# EAGLE board EC544_v1 (EAGLE 9.6.2)
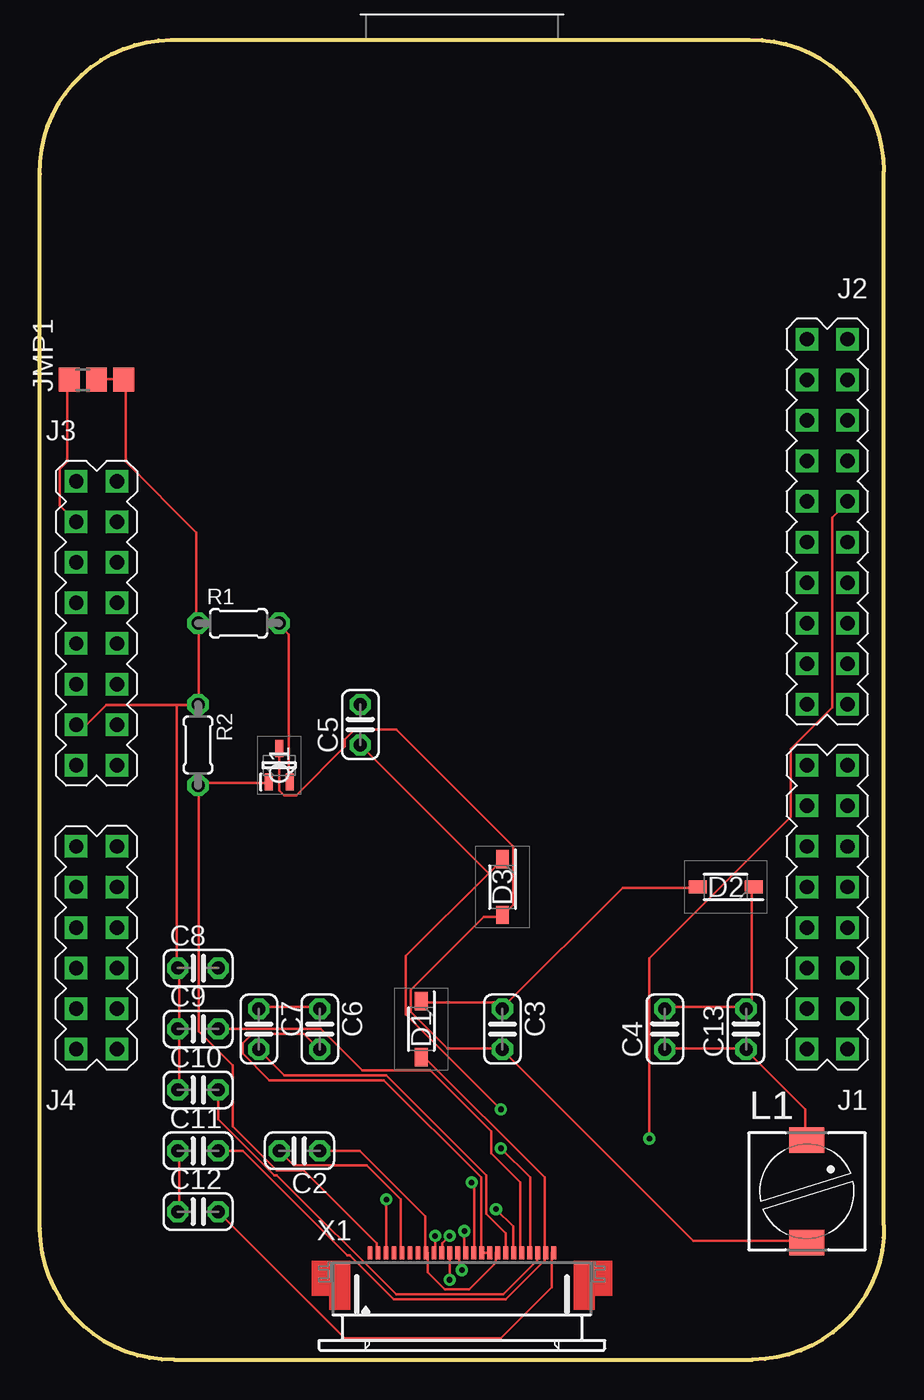
[diagram p0: board, top side]
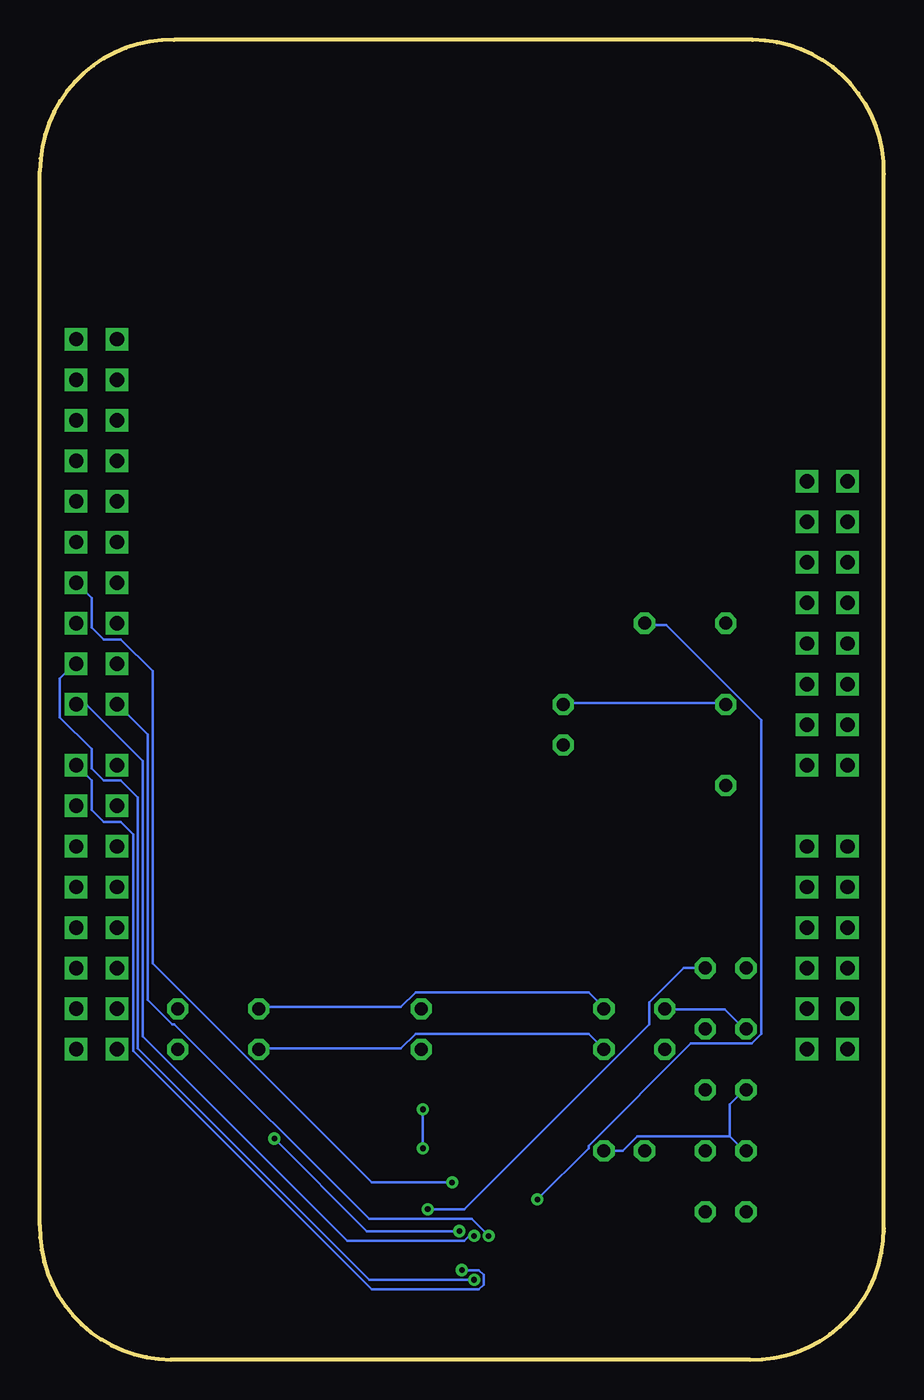
[diagram p1: board, bottom side, seen from below]

Size 52.8 x 82.6 mm. Coordinates in mm from the lower left corner, seen from the top.
Copper layers (1*16): Top 0.035mm / dielectric 1.5mm / Bottom 0.035mm
Design rules "default": minimum track width 6mil, minimum drill 0.35mm, track to track 6mil, track to pad 6mil, pad to pad 6mil, via to via 6mil, smd to smd 6mil, copper to edge 40mil, drill to drill 6mil, minimum pad ring 10mil, minimum via ring 8mil, stop-mask expansion 4mil, vias tented up to drill 0mil, thermal gap 10mil

## Footprints (pad centres in the part's own frame; a part is rotated, then mirrored left to right if it is on the bottom)
C025-024X044 = drill 0.813 octagon: 1 -1.27,0; 2 1.27,0
SOD3716X135N = smd 1.15 x 0.8: 1 -1.75,0; 2 1.75,0
FRDM_K64F = drill 0.9 square: J1.1 -21.59,17.78; J1.2 -24.13,17.78; J1.3 -21.59,15.24; J1.4 -24.13,15.24; J1.5 -21.59,12.7; J1.6 -24.13,12.7; J1.7 -21.59,10.16; J1.8 -24.13,10.16; J1.9 -21.59,7.62; J1.10 -24.13,7.62; J1.11 -21.59,5.08; J1.12 -24.13,5.08; J1.13 -21.59,2.54; J1.14 -24.13,2.54; J1.15 -21.59,0; J1.16 -24.13,0; J2.1 -21.59,-3.81; J2.2 -24.13,-3.81; J2.3 -21.59,-6.35; J2.4 -24.13,-6.35; J2.5 -21.59,-8.89; J2.6 -24.13,-8.89; J2.7 -21.59,-11.43; J2.8 -24.13,-11.43; J2.9 -21.59,-13.97; J2.10 -24.13,-13.97; J2.11 -21.59,-16.51; J2.12 -24.13,-16.51; J2.13 -21.59,-19.05; J2.14 -24.13,-19.05; J2.15 -21.59,-21.59; J2.16 -24.13,-21.59; J2.17 -21.59,-24.13; J2.18 -24.13,-24.13; J2.19 -21.59,-26.67; J2.20 -24.13,-26.67; J3.1 21.59,-17.78; J3.2 24.13,-17.78; J3.3 21.59,-15.24; J3.4 24.13,-15.24; J3.5 21.59,-12.7; J3.6 24.13,-12.7; J3.7 21.59,-10.16; J3.8 24.13,-10.16; J3.9 21.59,-7.62; J3.10 24.13,-7.62; J3.11 21.59,-5.08; J3.12 24.13,-5.08; J3.13 21.59,-2.54; J3.14 24.13,-2.54; J3.15 21.59,0; J3.16 24.13,0; J4.1 21.59,5.08; J4.2 24.13,5.08; J4.3 21.59,7.62; J4.4 24.13,7.62; J4.5 21.59,10.16; J4.6 24.13,10.16; J4.7 21.59,12.7; J4.8 24.13,12.7; J4.9 21.59,15.24; J4.10 24.13,15.24; J4.11 21.59,17.78; J4.12 24.13,17.78
A0R-JMP = smd 1.5 x 1.3: 1 0,1.7; 2 0,0; 3 0,-1.7
PIS2816 = smd 2.2 x 1.6: 1 0,3.2; 2 0,-3.2
SOT65P210X110-3N = smd 1.05 x 0.5: 1 -1.05,0.65; 2 -1.05,-0.65; 3 1.05,0
0204/5 = drill 0.813 octagon: 1 -2.54,0; 2 2.54,0
52745-2490 = smd 0.3 x 0.8: 1 -5.75,2.5; 2 -5.25,2.5; 3 -4.75,2.5; 4 -4.25,2.5; 5 -3.75,2.5; 6 -3.25,2.5; 7 -2.75,2.5; 8 -2.25,2.5; 9 -1.75,2.5; 10 -1.25,2.5; 11 -0.75,2.5; 12 -0.25,2.5; 13 0.25,2.5; 14 0.75,2.5; 15 1.25,2.5; 16 1.75,2.5; 17 2.25,2.5; 18 2.75,2.5; 19 3.25,2.5; 20 3.75,2.5; 21 4.25,2.5; 22 4.75,2.5; 23 5.25,2.5; 24 5.75,2.5

## Placement (x,y rotation side)
C2  [C025-024X044]  16.24,13.07 180 top
C3  [C025-024X044]  28.94,20.69 270 top
C4  [C025-024X044]  39.1,20.69 90 top
C5  [C025-024X044]  20.05,39.74 90 top
C6  [C025-024X044]  17.51,20.69 270 top
C7  [C025-024X044]  13.7,20.69 270 top
C8  [C025-024X044]  9.89,24.5 0 top
C9  [C025-024X044]  9.89,20.69 0 top
C10  [C025-024X044]  9.89,16.88 0 top
C11  [C025-024X044]  9.89,13.07 0 top
C12  [C025-024X044]  9.89,9.26 0 top
C13  [C025-024X044]  44.18,20.69 90 top
D1  MBR0530  [SOD3716X135N]  23.86,20.69 270 top
D2  MBR0530  [SOD3716X135N]  42.91,29.58 180 top
D3  MBR0530  [SOD3716X135N]  28.94,29.58 270 top
FRDM1  [FRDM_K64F]  26.4,37.2 180 top
JMP1  0R-JUMPA  [A0R-JMP]  3.54,61.33 90 top
L1  [PIS2816]  47.99,10.53 0 top
Q1  SI1308EDL-T1-GE3  [SOT65P210X110-3N]  14.97,37.2 90 top
R1  [0204/5]  12.43,46.09 0 top
R2  [0204/5]  9.89,38.47 270 top
X1  52745-2490  [52745-2490]  26.4,4.18 0 top

## Library data of the parts
C2-C13 = rcl; SPICEPREFIX: C
D1-D3 = MBR0530; ARROW_PART_NUMBER: MBR0530; ARROW_PRICE-STOCK: https://www.arrow.com/en/products/mbr0530/on-semiconductor?region=nac; DESCRIPTION: ON SEMICONDUCTOR - MBR0530 - DIODE, SCHOTTKY, 0.5A, 30V, SOD-123; HEIGHT: 1.35mm; MANUFACTURER_NAME: ON Semiconductor; MANUFACTURER_PART_NUMBER: MBR0530; MOUSER_PART_NUMBER: 512-MBR0530; MOUSER_PRICE-STOCK: https://www.mouser.co.uk/ProductDetail/ON-Semiconductor-Fairchild/MBR0530?qs=VOMQJJE%252BBNniwJKcE3T43Q%3D%3D
FRDM1 = Freedom
JMP1 = jump-0r-smd
L1 = rcl; SPICEPREFIX: L
Q1 = Si1308EDL-T1-GE3; ARROW_PART_NUMBER: SI1308EDL-T1-GE3; ARROW_PRICE-STOCK: https://www.arrow.com/en/products/si1308edl-t1-ge3/vishay?region=nac; DESCRIPTION: MOSFET N-Ch 30V 1.5A TrenchFET SC70 Vishay Si1308EDL-T1-GE3 N-channel MOSFET Transistor, 1.5 A, 30 V, 3-Pin SC-70; HEIGHT: 1.1mm; MANUFACTURER_NAME: Vishay; MANUFACTURER_PART_NUMBER: Si1308EDL-T1-GE3; MOUSER_PART_NUMBER: 78-SI1308EDL-T1-GE3; MOUSER_PRICE-STOCK: https://www.mouser.co.uk/ProductDetail/Vishay-Semiconductors/SI1308EDL-T1-GE3?qs=bX1%252BNvsK%2FBramh9tgpOaEw%3D%3D
R1 R2 = rcl; SPICEPREFIX: R
X1 = con-molex; MF: MOLEX; OC_FARNELL: unknown; OC_NEWARK: unknown

## Nets
0: C2.1 C4.2 C5.2 C6.1 C7.1 C8.1 C9.1 C10.1 C11.1 C12.1 C13.2 D2.1 FRDM1.J3.14 JMP1.2 JMP1.3 R1.1 R2.1 X1.8 X1.17
N$1: C2.2 X1.5
N$2: C4.1 C6.2 C13.1 L1.1 X1.15 X1.16
N$3: C3.1 D1.1 D2.2
N$4: C7.2 X1.18
N$5: C9.2 X1.20
N$6: C10.2 X1.22
N$7: C11.2 D1.2 X1.23
N$8: C12.2 X1.24
N$9: C3.2 D3.2 L1.2 Q1.3
N$10: C5.1 D3.1 X1.21
N$11: Q1.1 R2.2 X1.2
N$12: Q1.2 R1.2 X1.3
N$13: FRDM1.J3.4 JMP1.1
N$14: FRDM1.J2.1 X1.9
N$16: FRDM1.J2.2 X1.10
N$17: FRDM1.J2.4 X1.11
N$18: FRDM1.J1.16 X1.12
N$19: FRDM1.J2.12 X1.13
N$20: FRDM1.J2.8 X1.14
N$21: C8.2 X1.19

## Tracks (layer width: path | path; a pad name or v marks a point on that pad's centre or on a via)
0
  Top 0.152: JMP1.2 3.54,61.38 5.22,61.38 JMP1.3 5.37,61.23 5.37,56.2 9.79,51.78 9.79,46.14 R1.1 9.94,45.99 9.94,41.11 R2.1 9.79,40.96 8.57,40.96 | FRDM1.J3.14 2.93,39.74 4.15,40.96 8.57,40.96 | X1.17 28.53,6.67 28.53,6.06 26.86,4.38 25.33,4.38 24.27,5.45 24.27,6.67 X1.8 24.11,6.82 24.11,8.96 20,13.07 C2.1 | C12.1 8.72,9.26 8.72,13.07 C11.1 | D2.1 44.54,29.53 44.54,22.37 44.23,22.06 C13.2 44.08,22.06 39.2,22.06 C4.2 | C7.1 13.75,22.06 17.41,22.06 C6.1 | 8.72,20.69 8.72,16.88 C10.1 | 8.72,20.69 8.72,24.5 C8.1 8.57,24.5 8.57,40.96 | 8.72,20.69 C9.1
  Bottom 0.152: C5.2 20,41.11 9.94,41.11 R2.1 | C2.1 16.34,13.07 15.43,13.98 9.64,13.98 | 9.64,13.98 8.72,13.07 C11.1 | C7.1 13.6,21.91 9.94,21.91 8.72,20.69 C9.1 | C4.2 39.05,22.06 30.21,22.06 29.3,22.98 18.47,22.98 17.56,22.06 C6.1 | 9.64,13.98 9.64,15.97 8.72,16.88 C10.1
N$1
  Top 0.152: C2.2 15.88,12.16 20.46,12.16 22.59,10.02 22.59,6.82 X1.5
N$2
  Top 0.152: L1.1 47.89,13.83 47.89,15.66 44.23,19.32 C13.1 44.08,19.47 39.2,19.47 C4.1 | X1.16 28.08,6.67 27.77,6.67 X1.15 27.62,6.82 27.62,11.39 21.52,17.49 14.36,17.49 12.68,19.17 12.68,19.78 13.29,20.39 16.49,20.39 17.41,19.47 C6.2
  Bottom 0.152: C6.2 18.47,20.39 29.3,20.39 30.21,19.47 39.05,19.47 C4.1
N$3
  Top 0.152: D1.1 23.96,22.37 28.53,22.37 C3.1 28.99,22.06 36.46,29.53 41.03,29.53 D2.2
N$4
  Top 0.152: X1.18 29.14,6.82 29.14,7.89 27.92,9.11 27.92,11.55 21.68,17.79 15.27,17.79 13.75,19.32 C7.2
N$5
  Top 0.152: C9.2 17.56,20.69 20.15,18.1 24.42,18.1 28.23,14.29 28.23,12.92 30.06,11.09 30.06,6.82 X1.20
N$6
  Top 0.152: C10.2 11.16,15.05 14.66,11.55 14.82,11.55 22.28,4.08 28.99,4.08 31.12,6.21 31.12,6.67 X1.22
N$7
  Top 0.152: D1.2 23.96,19.01 31.58,11.39 31.58,6.82 X1.23 31.58,6.67 31.58,6.21 29.14,3.77 22.13,3.77 19.39,6.52 19.24,6.52 12.68,13.07 C11.2
N$8
  Top 0.152: C12.2 19.08,1.34 28.84,1.34 32.04,4.54 32.04,6.67 X1.24
N$9
  Top 0.152: Q1.3 14.97,35.63 15.27,35.32 16.04,35.32 19.08,38.37 19.08,38.83 19.69,39.44 22.28,39.44 29.6,32.12 29.6,28.46 28.99,27.85 D3.2 28.84,27.7 27.77,27.7 23.2,23.13 23.2,21.76 25.49,19.47 28.84,19.47 C3.2 28.99,19.32 40.88,7.43 47.89,7.43 L1.2
N$10  (via drill 0.35)
  Top 0.152: v28.84,13.22 30.67,11.39 30.67,6.82 X1.21 | v28.84,15.66 22.89,21.6 22.89,25.26 28.08,30.44 | 28.08,30.44 28.84,31.21 D3.1 | 28.08,30.44 C5.1
  Bottom 0.152: v28.84,15.66 v28.84,13.22
N$11
  Top 0.152: 9.94,35.93 9.94,20.54 12.07,18.4 12.07,14.59 14.82,11.85 16.49,11.85 21.07,7.28 21.07,6.82 X1.2 | 9.94,35.93 10.09,36.08 14.21,36.08 Q1.1 | 9.94,35.93 R2.2
N$12  (via drill 0.35)
  Top 0.152: v21.68,10.02 21.68,6.82 X1.3 | Q1.2 15.58,36.24 15.58,45.38 14.97,45.99 R1.2
  Bottom 0.152: v21.68,10.02 18.47,13.22 18.47,13.38 12.07,19.78 8.26,19.78 7.65,20.39 7.65,40.05 13.6,45.99 14.97,45.99 R1.2
N$13
  Top 0.152: FRDM1.J3.4 1.25,53.46 1.25,55.74 1.71,56.2 1.71,61.23 JMP1.1
N$14  (via drill 0.35)
  Top 0.152: v24.72,7.74 24.72,6.82 X1.9
  Bottom 0.152: v24.72,7.74 25.79,8.8 32.19,8.8 44.38,21 44.54,21 46.06,22.52 46.06,39.13 47.89,40.96 FRDM1.J2.1
N$16  (via drill 0.35)
  Top 0.152: v25.64,7.74 25.18,7.28 25.18,6.82 X1.10
  Bottom 0.152: v25.64,7.74 25.94,7.74 26.25,7.43 33.56,7.43 46.36,20.23 46.36,37.45 49.87,40.96 50.48,40.96 FRDM1.J2.2
N$17  (via drill 0.35)
  Top 0.152: v25.64,4.99 25.64,6.67 X1.11
  Bottom 0.152: v25.64,4.99 32.19,4.99 46.67,19.47 46.67,35.17 47.74,36.24 48.8,36.24 49.56,37 49.56,38.22 51.55,40.2 51.55,42.64 50.63,43.55 FRDM1.J2.4
N$18  (via drill 0.35)
  Top 0.152: v26.4,5.6 26.25,5.76 26.25,6.67 X1.12
  Bottom 0.152: v26.4,5.6 25.33,5.6 25.03,5.3 25.03,4.69 25.33,4.38 32.04,4.38 46.97,19.32 46.97,32.88 47.74,33.64 48.8,33.64 49.56,34.41 49.56,36.24 FRDM1.J1.16
N$19  (via drill 0.35)
  Top 0.152: v26.55,8.04 26.55,6.82 X1.13 | v38.13,13.83 38.13,25.11 46.97,33.95 46.97,38.22 49.56,40.81 49.56,52.69 50.48,53.61 FRDM1.J2.12
  Bottom 0.152: v26.55,8.04 32.34,8.04 v38.13,13.83
N$20  (via drill 0.35)
  Top 0.152: v27.01,11.09 27.16,10.94 27.16,6.82 X1.14
  Bottom 0.152: v27.01,11.09 32.04,11.09 45.75,24.81 45.75,43.09 47.74,45.07 48.8,45.07 49.56,45.84 49.56,47.67 FRDM1.J2.8
N$21  (via drill 0.35)
  Top 0.152: v28.53,9.41 29.6,8.35 29.6,6.82 X1.19
  Bottom 0.152: v28.53,9.41 26.25,9.41 14.66,21 14.66,22.37 12.53,24.5 C8.2